# Altium PCB UPS电路.PcbDoc
Units mil, origin at the board's own origin, x right, y up, seen from the top; angles counter-clockwise.
Board outline 2755.91 x 1968.5 mil, 2 copper layers (Top Layer, Bottom Layer); 41 components, 31 nets, 152 pads, 2 vias.
Unrouted connection lines stored in the file: 39.
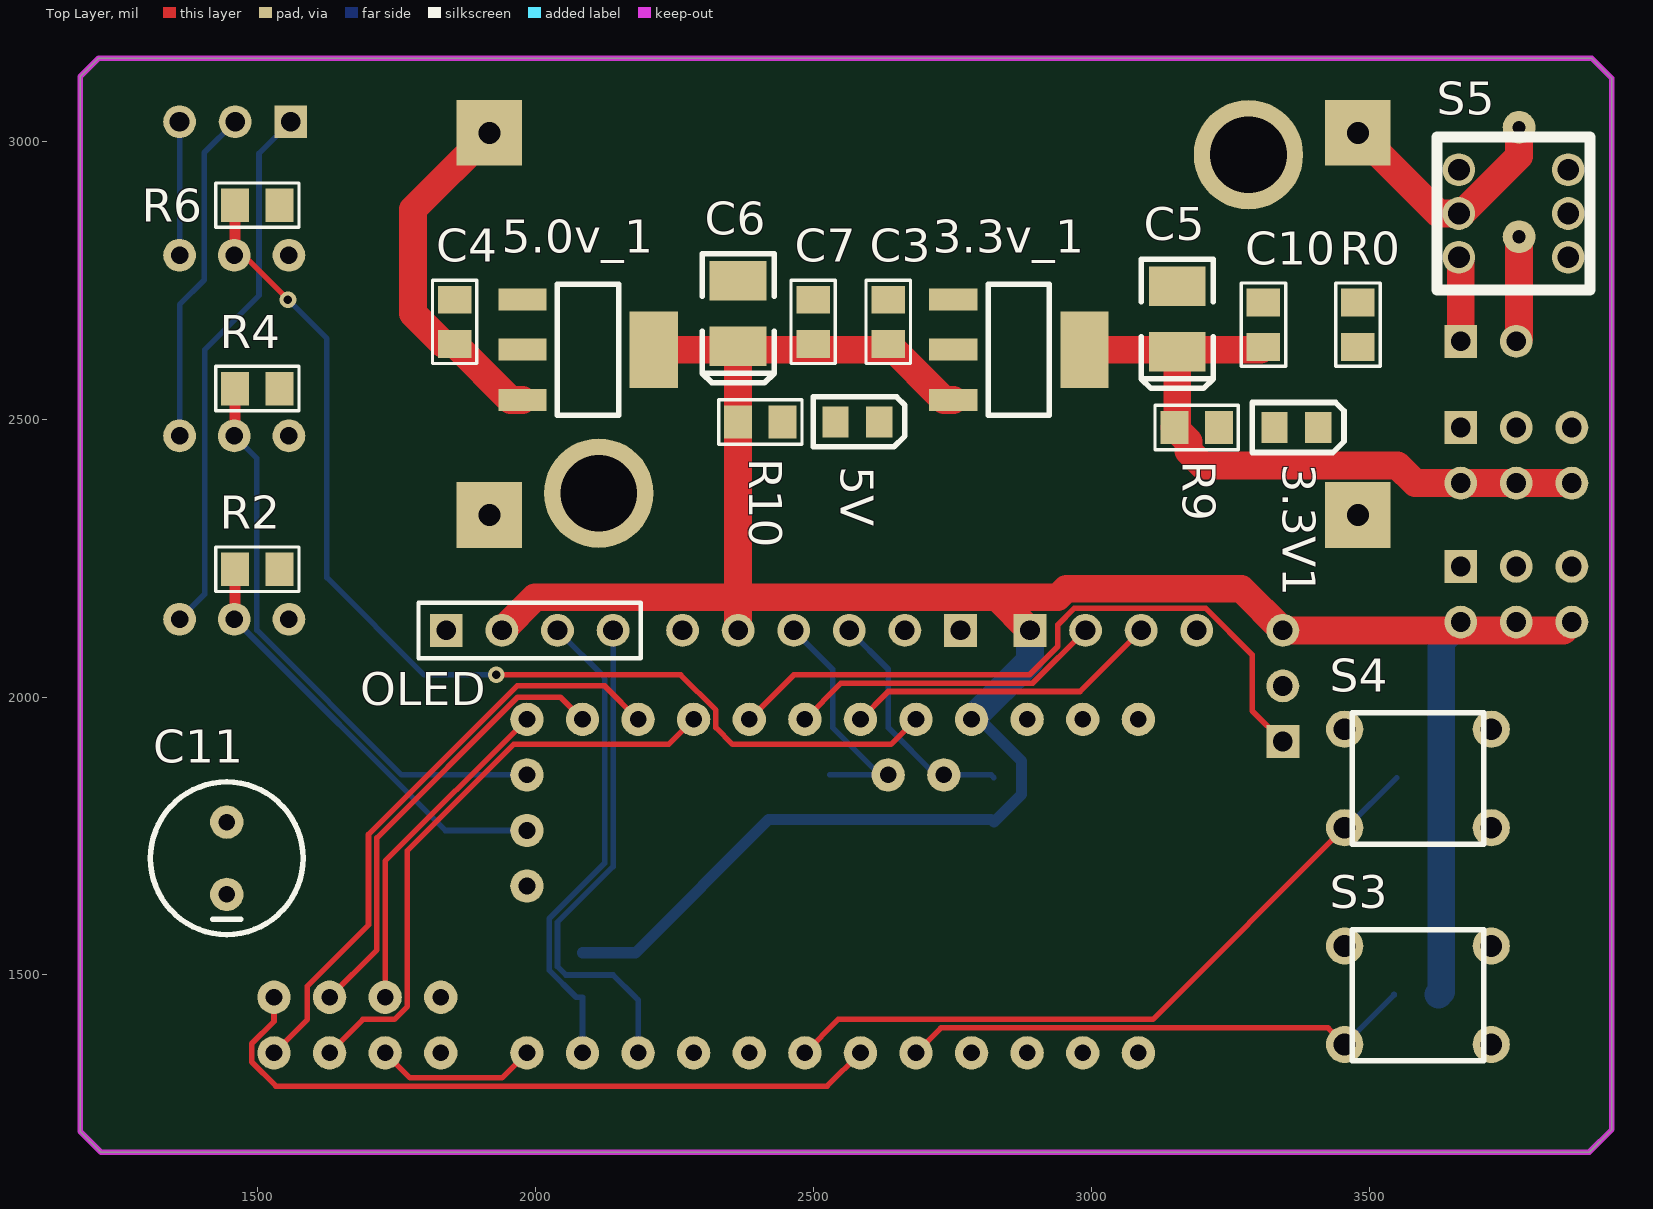
[diagram p0: Top Layer view]
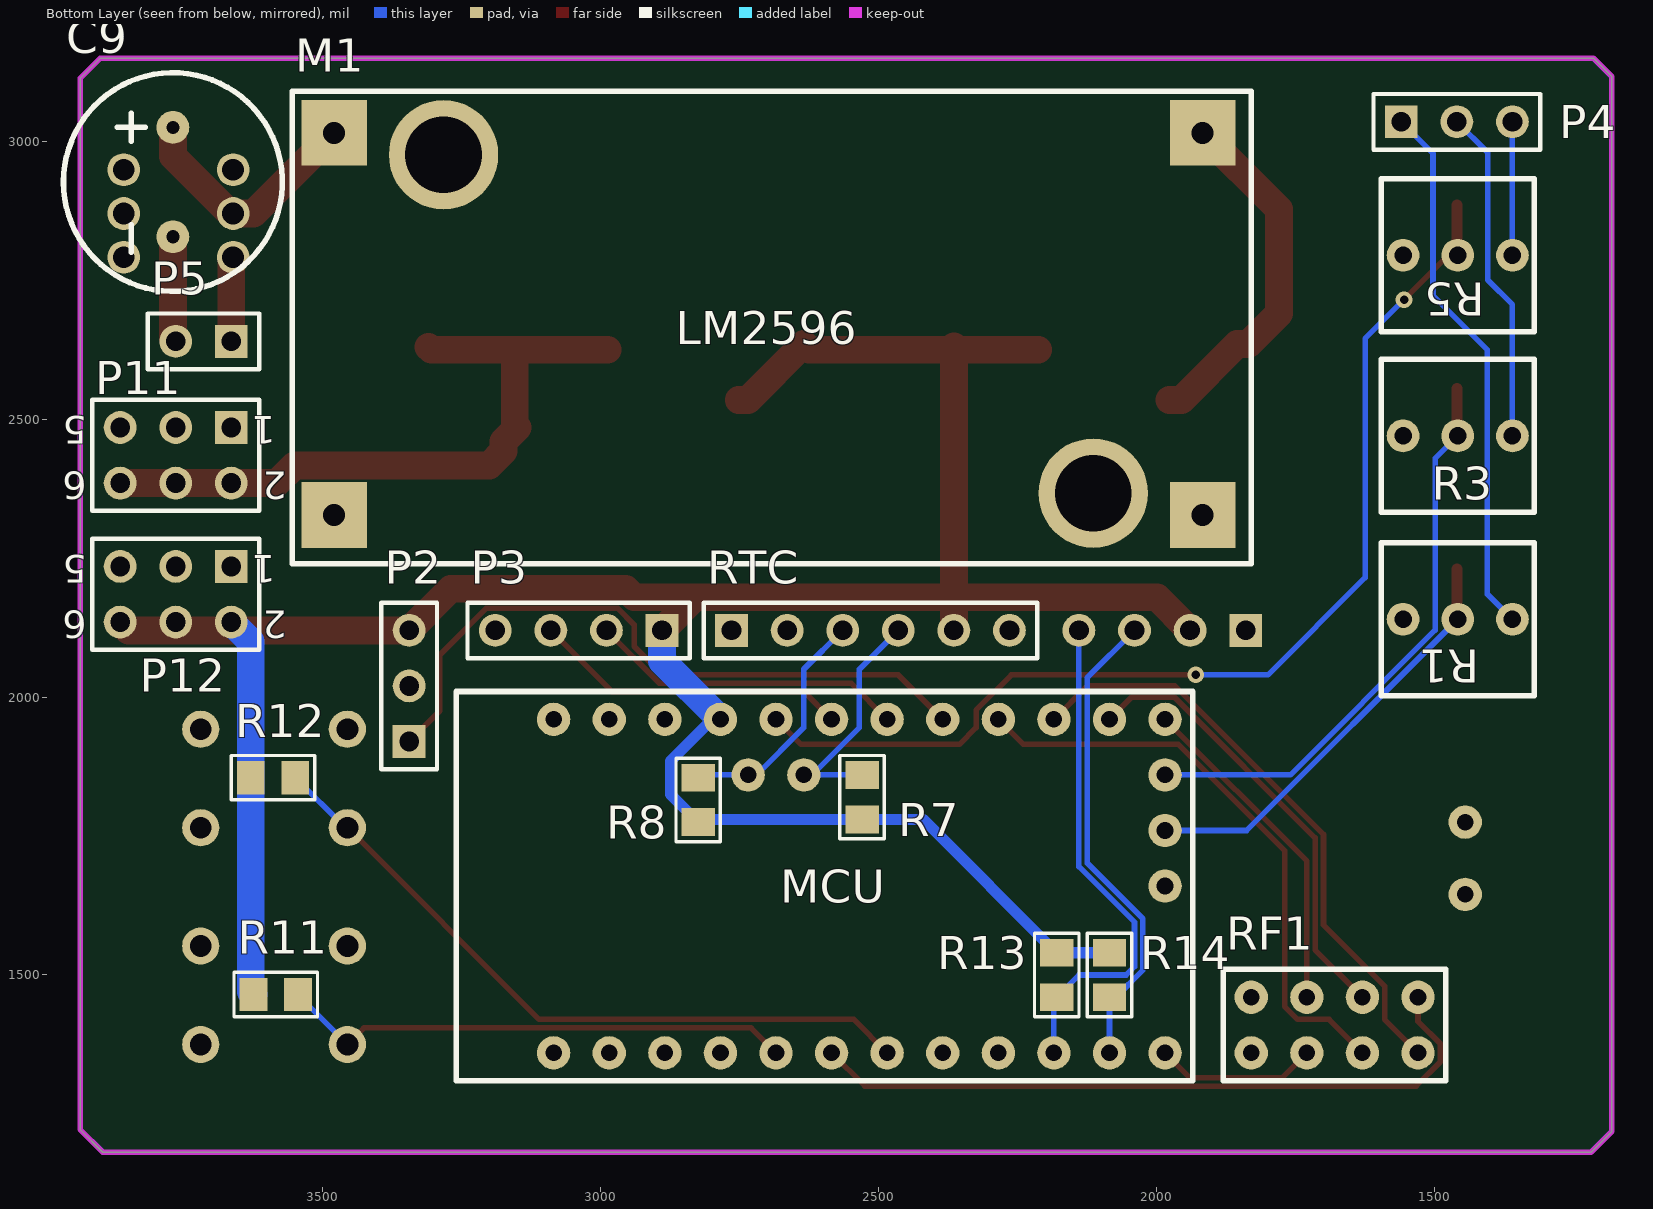
[diagram p1: Bottom Layer view, seen from below]

## Layer stack, top to bottom
Top Solder: solder mask 0.4, Solder Resist, Dk 3.5
Top Layer: signal copper 1.4
Dielectric 1: dielectric 12.6, FR-4, Dk 4.8
Bottom Layer: signal copper 1.4
Bottom Solder: solder mask 0.4, Solder Resist, Dk 3.5

## Board outline
1181.1,1218.9 1181.1,3116.1 1214.61,3149.61 3900.39,3149.61 3937.01,3112.99 3937.01,1222.01 3896.1,1181.1 1218.9,1181.1

## Design rules (kind name [scope] priority, off if disabled: settings)
Clearance [All] p1: gap=5
PolygonConnect [All] p1: connectstyle=Relief reliefconductorwidth=10 reliefentries=4 polygonreliefangle="90 Angle" airgapwidth=10
RoutingVias [All] p1: holewidth=28 width=50 viastyle="Through Hole" minholewidth=28 minwidth=50 maxholewidth=28 maxwidth=50
SolderMaskExpansion [All] p1: expansion=4
Width [All] p1: maxlimit=150 minlimit=5 preferedwidth=10
29 further rules are at their usual default settings.

## Components (designator, comment, footprint, x,y, rotation, side; value= is the part's Value field where it differs from the comment)
3.3V1 "3.3V1" LED 3330,2485 r0 top
3.3v_1 "LM1117_3.3" LC-SOT-223 2870,2625 r180 top
5.0v_1 "LM1117_5.0" LC-SOT-223 2095,2625 r180 top
5V "3.3V1" LED 2540,2495 r0 top
C3 "0.1uF" 0805 2635,2715 r270 top
C4 "0.1uF" 0805 1855,2715 r270 top
C5 "22uf" LC-CASE-B_3528 3155,2680 r270 top
C6 "22uf" LC-CASE-B_3528 2365,2690 r270 top
C7 "1uF" 0805 2500,2715 r270 top
C9 "470uF" 470uf-2 3770,3025 r270 bottom
C10 "1uF" 0805 3310,2710 r270 top
C11 "220uF" 220uf 1445,1775 r270 top
M1 "12V-8V" LM2596 3480,3015 r180 bottom
MCU "Arduino Pro Mini" Arduino_Promini 3085,1360 r180 bottom
OLED "Header 4" HDR1X4 1840,2120 r0 top
P2 "Relay3" HDR1X3 3345,1920 r90 bottom
P3 "Relay12" HDR1X4 2890,2120 r0 bottom
P4 "Sample" HDR1X3 1560,3035 r180 bottom
P5 "Power" HDR1X2 3665,2640 r0 bottom
P11 "5V Hub" HDR2X3 3665,2485 r0 bottom
P12 "3.3V Hub" HDR2X3 3665,2235 r0 bottom
R0 "Res2" 0805 3480,2710 r270 top
R1 "Res Adj2" AdjRes 1360,2140 r0 bottom
R2 "Res2" 0805 1460,2230 r0 top
R3 "Res Adj2" AdjRes 1360,2470 r0 bottom
R4 "Res2" 0805 1460,2555 r0 top
R5 "Res Adj2" AdjRes 1360,2795 r0 bottom
R6 "Res2" 0805 1460,2885 r0 top
R7 "Res2" 0805 2530,1860 r270 bottom
R8 "Res2" 0805 2825,1855 r270 bottom
R9 "1K" 0805 3230,2485 r180 top
R10 "1K" 0805 2445,2495 r180 top
R11 "Res2" 0805 3625,1465 r180 bottom
R12 "Res2" 0805 3630,1855 r180 bottom
R13 "Res2" 0805 2180,1460 r90 bottom
R14 "Res2" 0805 2085,1460 r90 bottom
RF1 "NRF24L01" NRF24L01 1830,1360 r90 bottom
RTC "Header 6" HDR1X6 2765,2120 r180 bottom
S3 "SW-SPST" SWITCH6*6*5 3720,1375 r180 top
S4 "SW-SPST" SWITCH6*6*5 3720,1765 r180 top
S5 "PowerSwitch" Swtich7*7 3760,2870 r90 top

## Footprints (in the part's own frame and the unit in brackets; to place one, negate y for a bottom-side part, rotate by r counter-clockwise, add the part's x,y. Pads: shape width x height; smd on the part's side, far side on the other; paste and mask are expansions set on the pad)
220uf [mil]
  round 60 hole 30: 1(0,0) 2(130,0)
  silkscreen extent -72,-137 202,137
470uf-2 [mm]
  round 1.5 hole 0.6: 1(0,0) 2(5,0)
  silkscreen extent -2.5,-5 7.5,5
0805 [mil]
  rect 50x60 smd: 1(0,0) 2(80,0)
  silkscreen extent -35,-40 115,40
AdjRes [mm]
  round 1.5 hole 0.8: 1(0,0) 2(2.5,0) 3(5,0)
  silkscreen extent -1,-3.5 6,3.5
Arduino_Promini [mil]
  round 60 hole 30: 1(0,0) 2(100,0) 3(200,0) 4(300,0) 4(1100,300) 5(400,0) 6(500,0) 7(600,0) 8(700,0) 9(800,0) 10(900,0) 11(1000,0) 12(1100,0) 13(1100,600) 14(1000,600) 15(900,600) 16(800,600) 17(700,600) 18(600,600) 19(500,600) 20(400,600) 21(300,600) 22(200,600) 23(100,600) 24(0,600) 31(450,500) 32(350,500) 33(1100,400) 34(1100,500)
  silkscreen extent -175,-50 1150,650
HDR1X2 [mm] "Connector; Header; 2 Position"
  rect 1.5x1.5 hole 0.9: 1(0,0)
  round 1.5 hole 0.9: 2(2.54,0)
  silkscreen extent -1.27,-1.27 3.81,1.27
HDR1X3 [mm] "Connector; Header; 3 Position"
  rect 1.5x1.5 hole 0.9: 1(0,0)
  round 1.5 hole 0.9: 2(2.54,0) 3(5.08,0)
  silkscreen extent -1.27,-1.27 6.35,1.27
HDR1X4 [mm] "Connector; Header; 4 Position"
  rect 1.5x1.5 hole 0.9: 1(0,0)
  round 1.5 hole 0.9: 2(2.54,0) 3(5.08,0) 4(7.62,0)
  silkscreen extent -1.27,-1.27 8.89,1.27
HDR1X6 [mm] "Connector; Header; 6 Position"
  rect 1.5x1.5 hole 0.9: 1(0,0)
  round 1.5 hole 0.9: 2(2.54,0) 3(5.08,0) 4(7.62,0) 5(10.16,0) 6(12.7,0)
  silkscreen extent -1.27,-1.27 13.97,1.27
HDR2X3 [mm] "Connector; Header; 3x2 Position"
  rect 1.5x1.5 hole 0.9: 1(0,0)
  round 1.5 hole 0.9: 2(0,2.54) 3(2.54,0) 4(2.54,2.54) 5(5.08,0) 6(5.08,2.54)
  silkscreen extent -1.27,-1.27 6.35,3.81
LC-CASE-B_3528 [mm]
  rect 1.8x2.6 smd: 1(1.5,0) 2(-1.5,0)
  silkscreen extent -2.73,-1.65 3.16,1.65, body extent -1.85,-1.47 1.85,1.46, height 2.03
LC-SOT-223 [mm]
  rect 2.2x1 smd: 1(3,-2.3) 2(3,0) 3(3,2.3)
  rect 2.2x3.5 smd: 2(-3,0)
  silkscreen extent -1.4,-3 1.4,3, body extent -3.49,-3.24 3.49,3.24, height 1.64
LED [mm]
  rect 1.2x1.4 smd: 1(0,0) 2(2,0)
  silkscreen extent -1.02,-1.14 3.17,1.14
LM2596 [mm]
  rect 3x3 hole 1: 1(0,0) 2(0,-17.462) 3(39.688,0) 4(39.688,-17.463)
  round 5 hole 3.5: 5(5,-1) 5(34.688,-16.462)
  silkscreen extent -1.91,-19.69 41.91,1.91
NRF24L01 [mil]
  round 60 hole 30: 1(0,0) 2(100,0) 3(0,-100) 4(100,-100) 5(0,-200) 6(100,-200) 7(0,-300) 8(100,-300)
  silkscreen extent -50,-350 150,50
SWITCH6*6*5 [mm]
  round 1.7 hole 1: 1(0,0) 2(6.7,0) 3(0,-4.5) 4(6.7,-4.5)
  silkscreen extent 0.35,-5.25 6.35,0.75
Swtich7*7 [mm]
  round 1.5 hole 1: 1(-2,2.5) 2(0,2.5) 3(2,2.5) 4(-2,-2.5) 4(0,-2.5) 4(2,-2.5)
  silkscreen extent -3.5,-3.5 3.5,3.5

## Part data
3.3V1 5V: library part LED, "Typical RED, GREEN, YELLOW, AMBER GaAs LED"
3.3v_1 5.0v_1: library part LM1117
C3 C4 C7 C10: library part cap, "Capacitor"
C5 C6: library part Cap2, "Capacitor"
C9: library part "Cap Pol2", "Polarized Capacitor (Axial)"
C11: library part "Cap Pol1", "Polarized Capacitor (Radial)"
M1: library part 12V-5V
OLED: "Header, 4-Pin"
P2 P4: library part "Header 3", "Header, 3-Pin"
P3: library part "Header 4", "Header, 4-Pin"
P5: library part "Header 2", "Header, 2-Pin"
P11 P12: library part "Header 3X2", "Header, 3-Pin, Dual row"
R0 R2 R4 R6 R7 R8 R11 R12 R13 R14: "Resistor"
R1 R3 R5: "Variable Resistor"
R9 R10: library part RES2_1, "Resistor"
RTC: "Header, 6-Pin"
S3 S4: "Single-Pole, Single-Throw Switch"
S5: library part SW-SPST, "Single-Pole, Single-Throw Switch"

## Via types
v1: diameter 30, hole 15, Top Layer to Bottom Layer, tented both sides, 2 vias

## Nets (pads, with @x,y where several pads share a name; then routed paths per layer and width w, separated by ;. In a path a pad name is that pad's centre, name@x,y a point inside that pad or via, vN(x,y) a via of type N, cw(c..) or ccw(c..) an arc to the next point about the centre after c; other vN are vias at no path point)
3.3V: 3.3v_1.2 C5.1 C10.2 C11.1 P11.2 P11.4 P11.6 R9.2 RF1.2 | length 1228.6
  Top Layer w50: 3.3v_1.2@2988.11,2625 3305,2625 C10.2 ; C5.1 3155,2490 R9.2 3175,2460 3175,2442.57 3201.02,2416.56 3551.48,2416.56 3583.04,2385 P11.2 P11.4 P11.6
5V: 3.3v_1.3 5.0v_1.2 C3.2 C6.1 C7.2 MCU.21 OLED.2 P2.3 P3.1 P12.2 P12.4 P12.6 R7.2 R8.2 R10.2 R11.1 R12.1 R13.2 R14.2 RTC.5 | length 5156.4
  Top Layer w50: OLED.2 1999.53,2179.53 2365,2179.53 ; 5.0v_1.2@2213.11,2625 C6.1@2365,2625 ; RTC.5 2365,2179.53 ; C6.1 C6.1@2365,2625 ; 3.3v_1.3 2735.55,2534.45 C3.2 2625,2625 C6.1@2365,2625 ; P3.1 2830.47,2179.53 ; P12.6 3850,2120 P2.3 3270,2195 2955.5,2195 2940.03,2179.53 2830.47,2179.53 ; 2365,2179.53 2830.47,2179.53 ; 2365,2179.53 R10.2 C6.1@2365,2625
  Bottom Layer w20: R14.2 R13.2 2420,1780 R7.2 2820,1780 R8.2 2875,1825 2875,1885 2800,1960 MCU.21
  Bottom Layer w50: MCU.21 2890,2065 P3.1 ; R11.1 3630,1470 R12.1 3630,2100 P12.2
8V: 5.0v_1.3 C4.2 M1.3 | length 643.3
  Top Layer w50: M1.3 1780,2877.5 1780,2690 1835,2635 C4.2 1955.55,2534.45 5.0v_1.3
12V_MCU: C9.1 M1.1 S5.2 | length 444.7
  Top Layer w50: M1.1 3625,2870 S5.2 3667.02,2870 3770,2972.98 C9.1
DGND: C11.2 MCU.4 MCU.23 OLED.1 R0.2 RF1.1 RTC.6
GND: 3.3V1.2 3.3v_1.1 5.0v_1.1 5V.2 C3.1 C4.1 C5.2 C6.2 C7.1 C9.2 C10.1 M1.2 M1.4 P2.2 P3.4 P5.2 P11.1 P11.3 P11.5 P12.1 P12.3 P12.5 R0.1 R2.2 R4.2 R6.2 S3.1 S4.1 | length 190.2
  Top Layer w50: P5.2 3770,2645 C9.2
K1: MCU.5 R11.2 S3.2 | length 929.1
  Top Layer w10: MCU.5 2730,1405 3426.22,1405 S3.2
  Bottom Layer w10: S3.2 3545,1463.78 R11.2
K2: MCU.7 R12.2 S4.2 | length 1270
  Top Layer w10: MCU.7 2545,1420 3111.22,1420 S4.2
  Bottom Layer w10: S4.2 3460,1765 R12.2
Net3.3V1_1: 3.3V1.1 R9.1
Net5V_1: 5V.1 R10.1
NetP5_1: P5.1 S5.1 | length 152.7
  Top Layer w50: S5.1 3665,2787.83 P5.1
NRF_CE: MCU.12 RF1.3 | length 292.3
  Top Layer w10: RF1.3 1775,1315 1940,1315 MCU.12
NRF_CSN: MCU.13 RF1.4 | length 605.6
  Top Layer w10: RF1.4 1730,1705 MCU.13
NRF_IRQ: MCU.6 RF1.8 | length 1271
  Top Layer w10: RF1.8 1530,1416.57 1490,1376.57 1490,1343.43 1533.43,1300 2525,1300 MCU.6
NRF_MISO: MCU.15 RF1.7 | length 1083.7
  Top Layer w10: RF1.7 1590,1420 1590,1480 1700,1590 1700,1752.78 1967.22,2020 2125,2020 MCU.15
NRF_MOSI: MCU.14 RF1.6 | length 813.3
  Top Layer w10: RF1.6 1715,1545 1715,1746.57 1968.43,2000 2045,2000 MCU.14
NRF_SCK: MCU.16 RF1.5 | length 1067.8
  Top Layer w10: RF1.5 1690,1420 1746.57,1420 1770,1443.43 1770,1723.79 1961.21,1915 2240,1915 MCU.16
OLED_SCL: MCU.11 OLED.3 R14.1 | length 868.1
  Bottom Layer w10: OLED.3 2125,2035 2125,1701.21 2025,1601.21 2025,1508.79 2073.79,1460 R14.1 MCU.11
OLED_SDA: MCU.10 OLED.4 R13.1 | length 911.3
  Bottom Layer w10: OLED.4 2140,1695 2040,1595 2040,1515 2055,1500 2140,1500 R13.1 2185,1455 MCU.10
RLYCTRL1: MCU.19 P3.3 | length 571.3
  Top Layer w10: MCU.19 2635,2010 2980,2010 P3.3
RLYCTRL2: MCU.18 P3.2 | length 571.3
  Top Layer w10: MCU.18 2550,2025 2895,2025 P3.2
RLYCTRL3: MCU.17 P2.1 | length 1224.1
  Top Layer w10: MCU.17 2465,2040 2888.79,2040 2940,2091.21 2940,2130 2970,2160 3205.9,2160 3290,2075.9 3290,1975 P2.1
RTC_SQW: RTC.2
S1: P4.1 R1.1 | length 977.8
  Bottom Layer w10: R1.1 1405,2185 1405,2624.71 1502.95,2722.66 1502.95,2977.95 P4.1
S2: P4.2 R3.1 | length 606.4
  Bottom Layer w10: R3.1 1360,2705.94 1404.53,2750.47 1404.53,2979.53 P4.2
S3: P4.3 R5.1 | length 240
  Bottom Layer w10: R5.1 P4.3
SAMPLE1: MCU.33 R1.2 R2.1 | length 774.6
  Top Layer w20: R1.2 1460,2141.57 R2.1
  Bottom Layer w10: R1.2 1838.43,1760 MCU.33
SAMPLE2: MCU.34 R3.2 R4.1 | length 1045.8
  Top Layer w20: R3.2 1460,2471.57 R4.1
  Bottom Layer w10: R3.2 1499.03,2429.39 1499.03,2120.61 1759.64,1860 MCU.34
SAMPLE3: MCU.20 R5.2 R6.1 | length 1970.8
  Top Layer w10: R5.2 1475,2795 v1(1555,2715) ; v1(1930,2040) 2261.57,2040 2325,1976.57 2325,1945 2355,1915 2640,1915 MCU.20
  Top Layer w20: R5.2 1460,2796.57 R6.1
  Bottom Layer w10: v1(1555,2715) 1625,2645 1625,2215 1800,2040 v1(1930,2040)
SCL: MCU.32 R8.1 RTC.3 | length 431.3
  Bottom Layer w10: RTC.3 2635,2050 2635,1945 2720,1860 MCU.32 2820,1860 R8.1
SDA: MCU.31 R7.1 RTC.4 | length 429.2
  Bottom Layer w10: RTC.4 2535,2050 2535,1945 MCU.31@2620,1860 ; R7.1 MCU.31@2620,1860 ; MCU.31 MCU.31@2620,1860
pads on no net: M1.5 MCU.1 MCU.2 MCU.3 MCU.8 MCU.9 MCU.22 MCU.24 R1.3 R3.3 R5.3 RTC.1 S3.3 S3.4 S4.3 S4.4 S5.3 S5.4

## Keep-outs
Keep-Out Layer:
  the board outline again, w10

## Text inside footprints (layer, text, board x,y; h text height)
M1: Bottom Overlay "LM2596" at 2865,2635 h60
P11: Bottom Overlay "1" at 3585,2505 h50 r180; Bottom Overlay "2" at 3565,2405 h50 r180; Bottom Overlay "5" at 3925,2505 h50 r180; Bottom Overlay "6" at 3925,2405 h50 r180
P12: Bottom Overlay "1" at 3585,2255 h50 r180; Bottom Overlay "2" at 3565,2155 h50 r180; Bottom Overlay "5" at 3925,2255 h50 r180; Bottom Overlay "6" at 3925,2155 h50 r180